# Altium PCB PCB.PcbDoc
Units mm, origin at the board's own origin, x right, y up, seen from the top; angles counter-clockwise.
Board outline 68.13 x 55.37 mm, 2 copper layers (Top Layer, Bottom Layer), stack 0.871 mm thick; 54 components, 87 nets, 298 pads, 1166 vias.
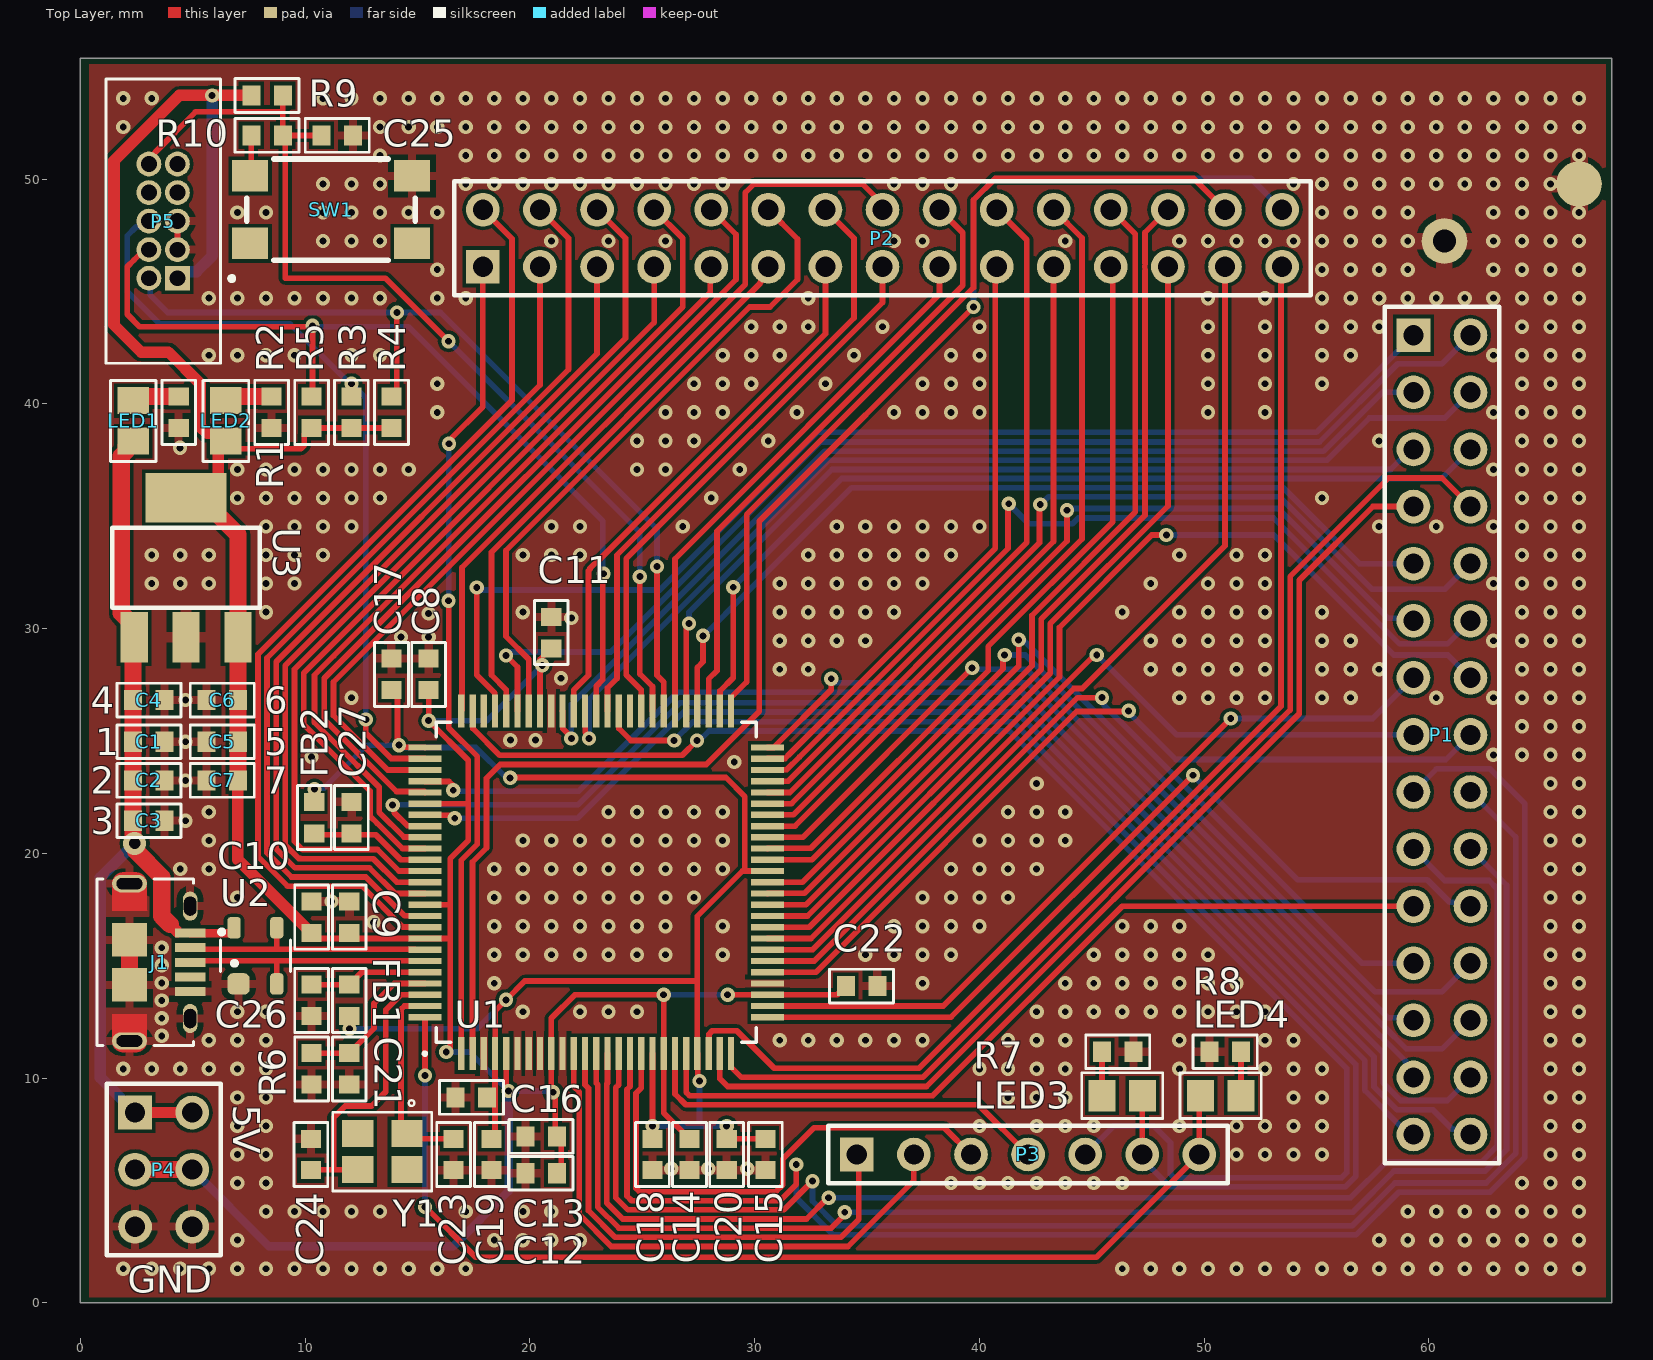
[diagram p0: Top Layer view]
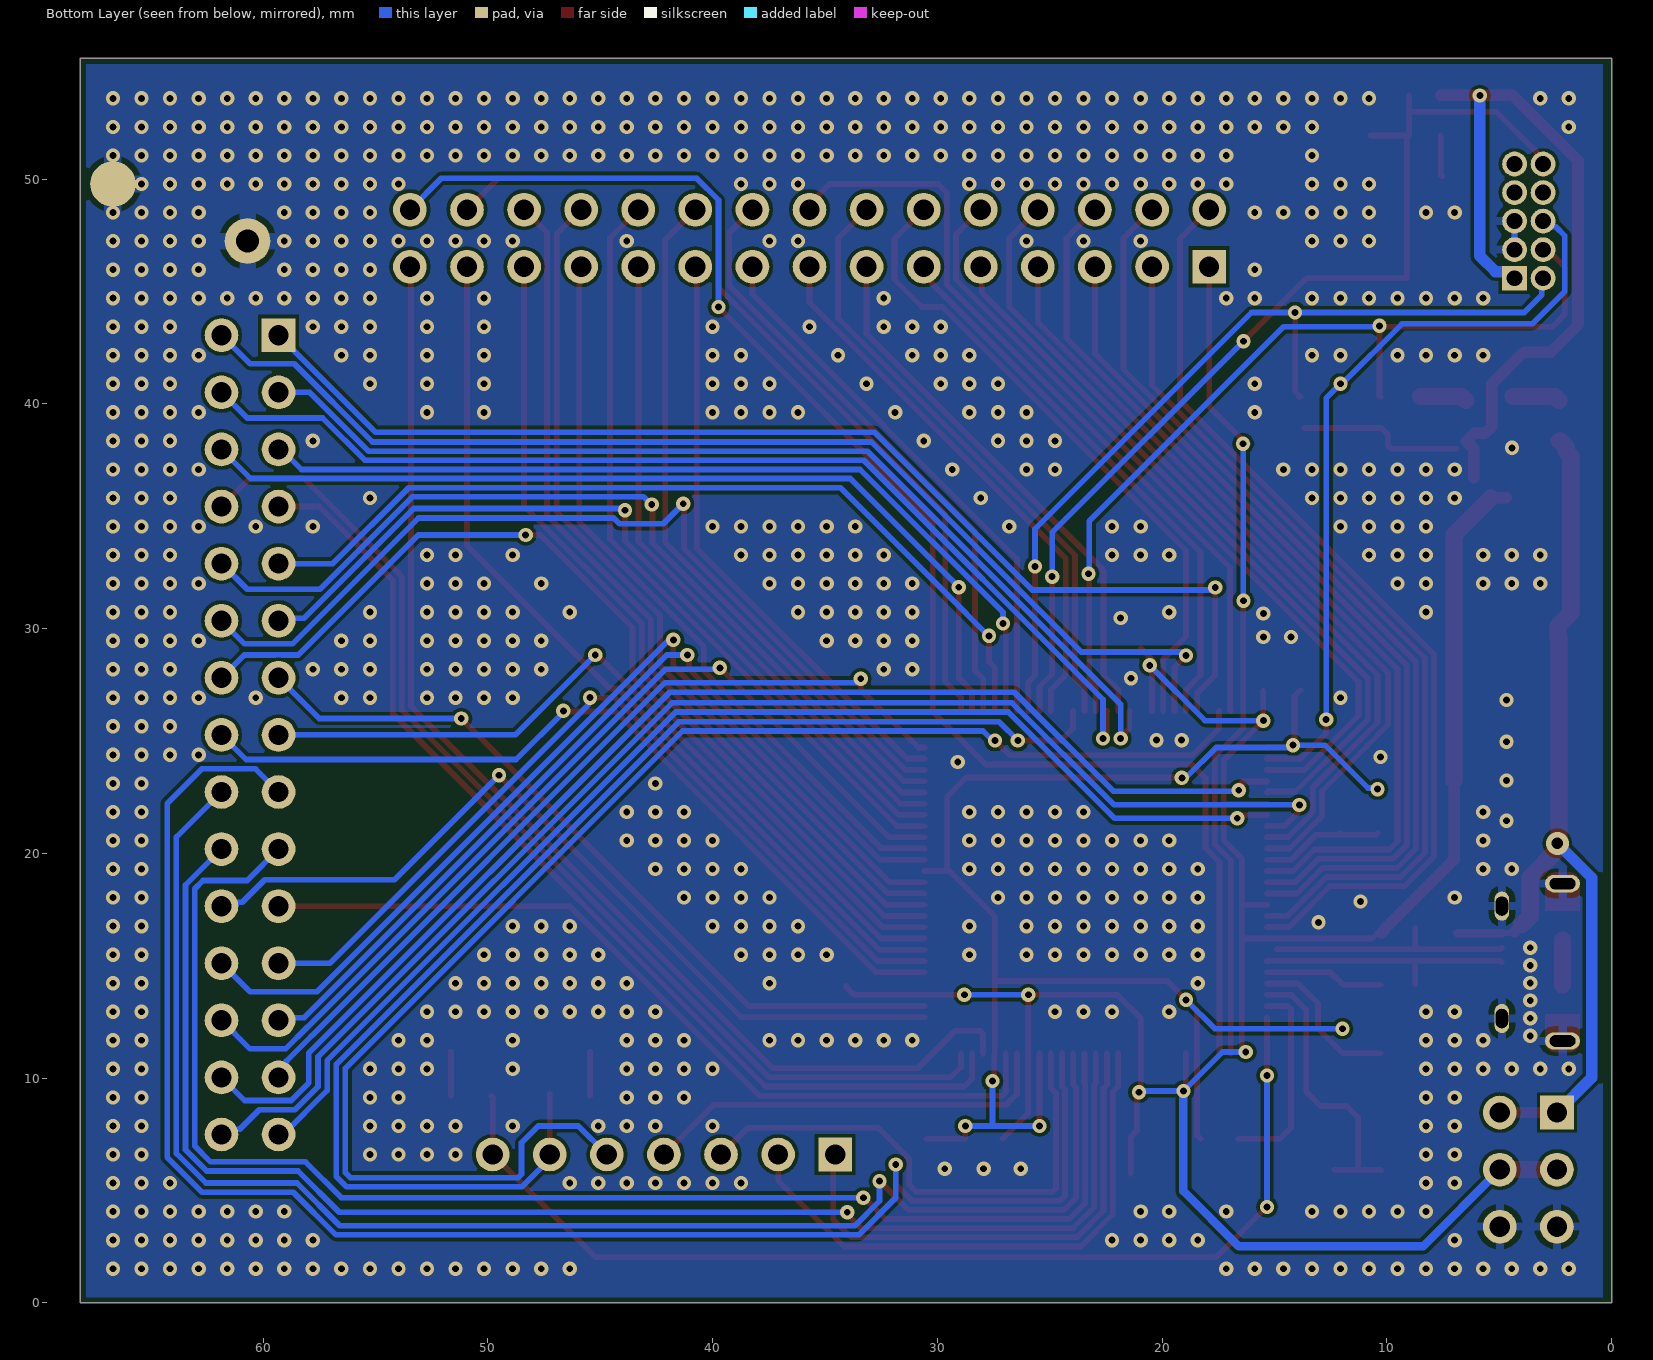
[diagram p1: Bottom Layer view, seen from below]
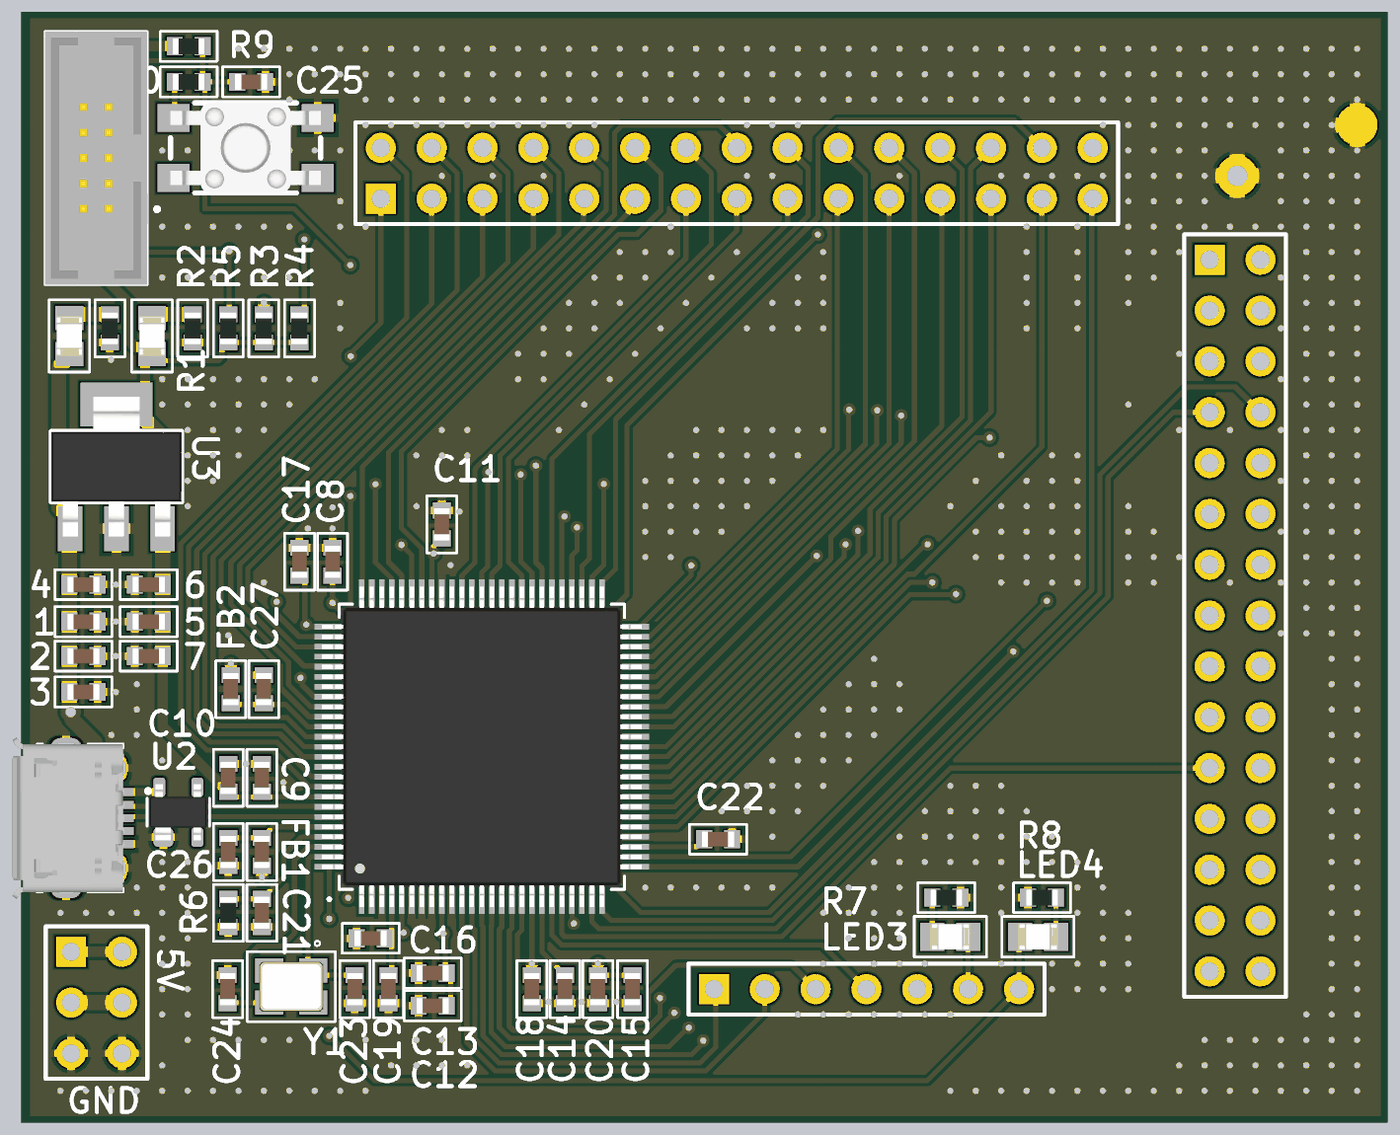
[diagram p2: 3D render of the assembled board from above, using the file's embedded part models]

## Layer stack, top to bottom
Top Solder: solder mask 0.0102, Solder Resist, Dk 3.5
Top Layer: signal copper 0.0356
Dielectric 1: core 0.8, FR-4, Dk 4.2
Bottom Layer: signal copper 0.0356
Solder Side: solder mask 0.0102, Solder Resist, Dk 3.5

## Board outline
0,0 0,55.372 68.127,55.372 68.127,0

## Design rules (kind name [scope] priority, off if disabled: settings)
BoardOutlineClearance [All] p1: gap=0.254 ignorepadtopadclearanceinfootprint=FALSE except(0: Arc-SplitContinuation Track-SplitContinuation SMDPad-SplitContinuation THPad-SplitContinuation Via-SplitContinuation Fill-SplitContinuation Poly-SplitContinuation Region-SplitContinuation Text-SplitContinuation)
Clearance [IsVia vs IsPad] p1: gap=-0.025 ignorepadtopadclearanceinfootprint=TRUE except(0: Arc-Hole Track-Hole SMDPad-Hole THPad-Hole Via-Hole Fill-Hole Poly-Hole Region-Hole Text-Hole)
Clearance Clearance_1 [All] p2: gap=0.152 ignorepadtopadclearanceinfootprint=TRUE except(0: Arc-Hole Track-Hole SMDPad-Hole THPad-Hole Via-Hole Fill-Hole Poly-Hole Region-Hole Text-Hole)
DiffPairsRouting DiffPair_USB_DiffPairsRouting [InDifferentialPair ('USB_D')] p1: maxlimit=0.254 minlimit=0.254 mostfreqgap=0.254 toplayer_minwidth=0.254 toplayer_maxwidth=0.381 toplayer_prefwidth=0.381 bottomlayer_minwidth=0.254 bottomlayer_maxwidth=0.381 bottomlayer_prefwidth=0.381 maxuncoupledlength=3.81
DiffPairsRouting [All] p2: maxlimit=0.254 minlimit=0.254 mostfreqgap=0.254 toplayer_minwidth=0.381 toplayer_maxwidth=0.381 toplayer_prefwidth=0.381 bottomlayer_minwidth=0.381 bottomlayer_maxwidth=0.381 bottomlayer_prefwidth=0.381 maxuncoupledlength=12.7
MatchedLengths MatchLengths_xSignals_J1_U1,U2_1 [InxSignalClass('xSignals_J1_U1,U2_MatchLengthsClass_1')] p1: tolerance=2.54 checknetsindiffpair=FALSE checkdiffpairvsdiffpair=TRUE checkxsignals=TRUE checkothers=TRUE
MatchedLengths MatchLengths_xSignals_J1_U1,U2 [InxSignalClass('xSignals_J1_U1,U2_MatchLengthsClass')] p2: tolerance=2.54 checknetsindiffpair=FALSE checkdiffpairvsdiffpair=TRUE checkxsignals=TRUE checkothers=TRUE
MatchedLengths DiffPair_USB_MatchedLengths [InDifferentialPair ('USB_D')] p3: tolerance=3.81 checknetsindiffpair=FALSE checkdiffpairvsdiffpair=TRUE checkxsignals=TRUE checkothers=TRUE
MinimumSolderMaskSliver [All] p1 off: minsoldermaskwidth=0.254
PolygonConnect PolygonConnect_GND [All vs InNet('GND')] p1: thpad.connectstyle=Relief thpad.reliefconductorwidth=0.381 thpad.reliefentries=4 thpad.polygonreliefangle="90 Angle" thpad.airgapwidth=0.254 smdpad.connectstyle=Relief smdpad.reliefconductorwidth=0.381 smdpad.reliefentries=4 smdpad.polygonreliefangle="90 Angle" smdpad.airgapwidth=0.254 via.connectstyle=Direct via.reliefconductorwidth=0.254 via.reliefentries=4 via.polygonreliefangle="90 Angle" via.airgapwidth=0.254
PolygonConnect [All] p2: thpad.connectstyle=Relief thpad.reliefconductorwidth=0.254 thpad.reliefentries=4 thpad.polygonreliefangle="90 Angle" thpad.airgapwidth=0.254 smdpad.connectstyle=Relief smdpad.reliefconductorwidth=0.254 smdpad.reliefentries=4 smdpad.polygonreliefangle="90 Angle" smdpad.airgapwidth=0.254 via.connectstyle=Direct via.reliefconductorwidth=0.254 via.reliefentries=4 via.polygonreliefangle="90 Angle" via.airgapwidth=0.254
RoutingVias [All] p1: holewidth=0.711 width=1.27 viastyle="Through Hole" minholewidth=0.305 minwidth=0.635 maxholewidth=0.711 maxwidth=1.27
SilkToSilkClearance [All] p1: silktosilkclearance=0.127
SolderMaskExpansion [All] p1: expansion=0.089 istentingtop=FALSE
Width [All] p1: maxlimit=1.27 minlimit=0.127 preferedwidth=0.254
27 further rules are at their usual default settings.

## Classes and differential pairs
component class Main_Sheet: 1 2 3 4 5 6 7 C8 C9 C10 C11 C12 C13 C14 C15 C16 C17 C18 C19 C20 C21 C22 C23 C24 C25 C26 C27 FB1 FB2 J1 LED1 LED2 LED3 LED4 P5 R1 R2 R3 R4 R5 R6 R7 R8 R9 R10 SW1 U1 U2 U3 Y1
component class Connectors: P1 P2 P3 P4
differential pair USB_D: +USB_D_P -USB_D_N

## Components (designator, comment, footprint, x,y, rotation, side; value= is the part's Value field where it differs from the comment)
C1 "Cap" C0603 3.048,24.968 r0 top value=10uF
C2 "Cap" C0603 3.048,23.246 r0 top value=2.2uF
C3 "Cap" C0603 3.048,21.456 r0 top value=1uF
C4 "Cap" C0603 3.048,26.822 r0 top value=4.7uF
C5 "Cap" C0603 6.31,24.968 r180 top value=4.7uF
C6 "Cap" C0603 6.31,26.822 r180 top value=1uF
C7 "Cap" C0603 6.31,23.246 r0 top value=10uF
C8 "Cap" C0603 15.494,27.963 r270 top value=100nF
C9 "Cap" C0603 11.963,17.164 r270 top value=100nF
C10 "Cap" C0603 10.287,17.164 r270 top value=100nF
C11 "Cap" C0603 20.951,29.827 r270 top value=100nF
C12 "Cap" C0603 20.497,7.409 r0 top value=100nF
C13 "Cap" C0603 20.497,5.77 r0 top value=100nF
C14 "Cap" C0603 27.102,6.604 r90 top value=100nF
C15 "Cap" C0603 30.48,6.604 r270 top value=100nF
C16 "Cap" C0603 17.399,9.144 r180 top value=1uF
C17 "Cap" C0603 13.843,27.963 r90 top value=100nF
C18 "Cap" C0603 25.451,6.604 r270 top value=100nF
C19 "Cap" C0603 18.288,6.604 r270 top value=100nF
C20 "Cap" C0603 28.753,6.604 r270 top value=100nF
C21 "Cap" C0603 11.963,10.414 r270 top value=10pF
C22 "Cap" C0603 34.755,14.097 r0 top value=100nF
C23 "Cap" C0603 16.606,6.604 r90 top value=36pF
C24 "Cap" C0603 10.256,6.604 r270 top value=36pF
C25 "Cap" C0603 11.43,51.943 r0 top value=10nF
C26 "Cap" C0603 10.287,13.462 r90 top value=100nF
C27 "Cap" C0603 12.06,21.596 r270 top value=100nF
FB1 "Ferrite Bead" C0603 11.963,13.462 r270 top
FB2 "Ferrite Bead" C0603 10.409,21.596 r90 top
J1 "10118194-0001LF" AMPHENOL_10118194-0001LF 2.184,15.154 r270 top locked
LED1 "LED" LED0805 2.348,39.243 r90 top
LED2 "LED" LED0805 6.477,39.243 r90 top
LED3 "LED" LED0805 46.355,9.223 r180 top
LED4 "LED" LED0805 50.735,9.223 r0 top
P1 "Header 15X2" HDR2X15 59.309,43.053 r270 top locked
P2 "Header 15X2" HDR2X15 17.907,46.101 r0 top locked
P3 "Header 7" HDR1X7 34.544,6.604 r0 top
P4 "Header 3X2" HDR2X3 2.434,8.471 r270 top
P5 "Header 5X2" IPC_5X2_1.27MM 3.683,48.133 r90 top
R1 "Res" R0603 4.374,39.624 r270 top value=330
R2 "Res" R0603 8.509,39.624 r270 top value=330
R3 "Res" R0603 12.06,39.624 r90 top value=100K
R4 "Res" R0603 13.843,39.624 r90 top value=100K
R5 "Res" R0603 10.287,39.624 r90 top value=100K
R6 "Res" R0603 10.287,10.414 r270 top value=5.62K
R7 "Res" R0603 46.155,11.176 r0 top value=330
R8 "Res" R0603 50.935,11.176 r180 top value=330
R9 "Res" R0603 8.306,53.721 r0 top value=100K
R10 "Res" R0603 8.306,51.943 r180 top value=330
SW1 "Button" TL3305 11.151,48.641 r180 top
U1 "ATSAME70N19A-AN" TQFP100_14x14MC_MCH 22.951,18.715 r90 top locked
U2 "5.5V TVS Diode" SOT143 7.789,15.443 r90 top
U3 "AP2114HA" SOT230P700X180-4N 4.699,32.715 r0 top
Y1 "XTAL" SMD-4 13.431,6.731 r180 top

## Footprints (in the part's own frame and the unit in brackets; to place one, negate y for a bottom-side part, rotate by r counter-clockwise, add the part's x,y. Pads: shape width x height; smd on the part's side, far side on the other; paste and mask are expansions set on the pad)
AMPHENOL_10118194-0001LF [mm]
  rect 0.4x1.35 smd: 1(-1.3,2.7) 2(-0.65,2.7) 3(0,2.7) 4(0.65,2.7) 5(1.3,2.7)
  oval 1.3x0.65 hole 0.55 slot 0.85 at 0 deg: S1(-2.5,2.7) S2(2.5,2.7)
  oval 0.775x1.55 hole 0.5 slot 1.15 at 90 deg: S3(-3.5,0) S6(3.5,0)
  rect 1.5x1.55 smd: S4(-1,0) S5(1,0)
  Top Layer region: 193 vertices and 0 holes, not listed, extent 2.3,-0.78 4,0.775
  Top Layer region: 193 vertices and 0 holes, not listed, extent -4,-0.775 -2.3,0.78
  silkscreen extent -3.7,-1.45 3.7,4.2, body extent -4.02,-2.68 4.02,2.9, height 2.72
C0603 [mm] "Chip Capacitor, Body 1.6x0.8mm, IPC High Density"
  rect 0.8x0.9 smd: 1(-0.7,0) 2(0.7,0)
  silkscreen extent -1.43,-0.75 1.43,0.75, body extent -0.8,-0.4 0.8,0.4, height 0.8
HDR1X7 [mm] "Connector; Header; 7 Position"
  rect 1.5x1.5 hole 0.9: 1(0,0)
  round 1.5 hole 0.9: 2(2.54,0) 3(5.08,0) 4(7.62,0) 5(10.16,0) 6(12.7,0) 7(15.24,0)
  silkscreen extent -1.27,-1.27 16.51,1.27
HDR2X3 [mm] "Connector; Header; 3x2 Position"
  rect 1.5x1.5 hole 0.9: 1(0,0)
  round 1.5 hole 0.9: 2(0,2.54) 3(2.54,0) 4(2.54,2.54) 5(5.08,0) 6(5.08,2.54)
  silkscreen extent -1.27,-1.27 6.35,3.81
HDR2X15 [mm] "Connector; Header; 15x2 Position"
  rect 1.5x1.5 hole 0.9: 1(0,0)
  round 1.5 hole 0.9: 2(0,2.54) 3(2.54,0) 4(2.54,2.54) 5(5.08,0) 6(5.08,2.54) 7(7.62,0) 8(7.62,2.54) 9(10.16,0) 10(10.16,2.54) 11(12.7,0) 12(12.7,2.54) 13(15.24,0) 14(15.24,2.54) 15(17.78,0) 16(17.78,2.54) 17(20.32,0) 18(20.32,2.54) 19(22.86,0) 20(22.86,2.54) 21(25.4,0) 22(25.4,2.54) 23(27.94,0) 24(27.94,2.54) 25(30.48,0) 26(30.48,2.54) 27(33.02,0) 28(33.02,2.54) 29(35.56,0) 30(35.56,2.54)
  silkscreen extent -1.27,-1.27 36.83,3.81
IPC_5X2_1.27MM [mm]
  rect 1.1x1.1 hole 0.7: 1(-2.54,-0.635)
  round 1.1 hole 0.7: 2(-2.54,0.635) 3(-1.27,-0.635) 4(-1.27,0.635) 5(0,-0.635) 6(0,0.635) 7(1.27,-0.635) 8(1.27,0.635) 9(2.54,-0.635) 10(2.54,0.635)
  silkscreen extent -6.32,-3.15 6.32,2.55, body extent -6.32,-2.58 6.33,2.55, height 5.4
LED0805 [mm] "Chip Resistor, Body 2.0x1.2mm, IPC Medium Density"
  rect 1.2x1.4 smd: 1(-0.9,0) 2(0.9,0)
  silkscreen extent -1.8,-1.02 1.8,1.02, body extent -1,-0.62 1,0.63, height 1.1
R0603 [mm] "Chip Resistor Body 1.6x0.8mm, IPC High Density"
  rect 0.8x0.9 smd: 1(-0.7,0) 2(0.7,0)
  silkscreen extent -1.43,-0.75 1.43,0.75, body extent -0.8,-0.4 0.8,0.4, height 0.45
SMD-4 [mm]
  rect 1.4x1.2 smd: 1(-1.1,-0.8) 2(1.1,-0.8) 3(1.1,0.8) 4(-1.1,0.8)
  silkscreen extent -2.2,-2.29 2.2,1.75, body extent -1.6,-1.25 1.6,1.25, height 0.64
SOT143 [mm]
  rrect50% 0.95x0.99 smd: 1(-1.25,0.75)
  rrect50% 0.95x0.59 smd: 2(-1.25,-0.95) 3(1.25,-0.95) 4(1.25,0.95)
  silkscreen extent -0.7,-1.56 0.7,1.56, body extent -1.4,-1.45 1.4,1.45, height 1.2
SOT230P700X180-4N [mil]
  rect 48x88 smd: 1(-91,-122) 2(0,-122) 3(91,-122)
  rect 141.73x86.61 smd: 4(0,122.01)
  silkscreen extent -129,-70 129,70, body extent -128,-138 128,138, height 67
TL3305 [mm]
  rect 1.6x1.4 smd: 1(-3.6,-1.5) 2(3.6,-1.5) 3(-3.6,1.5) 4(3.6,1.5)
  silkscreen extent -3.75,-2.25 3.75,2.25, body extent -3.75,-2.25 3.75,2.25, height 6.9
TQFP100_14x14MC_MCH [mil]
  rect 58x11 smd paste+0 mask+0: 1(-300,236.22) 2(-300,216.54) 3(-300,196.85) 4(-300,177.17) 5(-300,157.48) 6(-300,137.8) 7(-300,118.11) 8(-300,98.43) 9(-300,78.74) 10(-300,59.06) 11(-300,39.37) 12(-300,19.69) 13(-300,0) 14(-300,-19.68) 15(-300,-39.37) 16(-300,-59.06) 17(-300,-78.74) 18(-300,-98.43) 19(-300,-118.11) 20(-300,-137.8) 21(-300,-157.48) 22(-300,-177.17) 23(-300,-196.85) 24(-300,-216.54) 25(-300,-236.22) 51(300,-236.22) 52(300,-216.54) 53(300,-196.85) 54(300,-177.17) 55(300,-157.48) 56(300,-137.8) 57(300,-118.11) 58(300,-98.43) 59(300,-78.74) 60(300,-59.06) 61(300,-39.37) 62(300,-19.68) 63(300,0) 64(300,19.68) 65(300,39.37) 66(300,59.06) 67(300,78.74) 68(300,98.43) 69(300,118.11) 70(300,137.8) 71(300,157.48) 72(300,177.17) 73(300,196.85) 74(300,216.54) 75(300,236.22)
  rect 11x58 smd paste+0 mask+0: 26(-236.22,-300) 27(-216.54,-300) 28(-196.85,-300) 29(-177.17,-300) 30(-157.48,-300) 31(-137.8,-300) 32(-118.11,-300) 33(-98.43,-300) 34(-78.74,-300) 35(-59.06,-300) 36(-39.37,-300) 37(-19.69,-300) 38(0,-300) 39(19.68,-300) 40(39.37,-300) 41(59.06,-300) 42(78.74,-300) 43(98.43,-300) 44(118.11,-300) 45(137.8,-300) 46(157.48,-300) 47(177.17,-300) 48(196.85,-300) 49(216.54,-300) 50(236.22,-300) 76(236.22,300) 77(216.54,300) 78(196.85,300) 79(177.17,300) 80(157.48,300) 81(137.8,300) 82(118.11,300) 83(98.43,300) 84(78.74,300) 85(59.06,300) 86(39.37,300) 87(19.68,300) 88(0,300) 89(-19.69,300) 90(-39.37,300) 91(-59.06,300) 92(-78.74,300) 93(-98.43,300) 94(-118.11,300) 95(-137.8,300) 96(-157.48,300) 97(-177.17,300) 98(-196.85,300) 99(-216.54,300) 100(-236.22,300)
  silkscreen extent -301,-280 280,301, body extent -315,-315 315,315, height 59

## Part data
FB2: "BLM18PG471SN1D"
J1: "USB - micro B USB 2.0 Receptacle Connector 5 Position Surface Mount, Right Angle; Through Hole", Package=None, Availability=Unavailable, MF="Amphenol ICC", MP=10118194-0001LF, Price=None, SnapEDA_Link=https://www.snapeda.com/parts/10118194-0001LF/Amphenol%20FCI/view-part/1413308/?ref=snap
P1 P2: "Header, 15-Pin, Dual row", LatestRevisionDate=17-Jul-2002, LatestRevisionNote="Re-released for DXP Platform.", Publisher="Altium Limited"
P3: "Header, 7-Pin", LatestRevisionDate=17-Jul-2002, LatestRevisionNote="Re-released for DXP Platform.", Publisher="Altium Limited"
P4: "Header, 3-Pin, Dual row", LatestRevisionDate=17-Jul-2002, LatestRevisionNote="Re-released for DXP Platform.", Publisher="Altium Limited"
P5: "Header, 5-Pin, Dual row", LatestRevisionDate=17-Jul-2002, LatestRevisionNote="Re-released for DXP Platform.", Publisher="Altium Limited"
SW1: "Push Button"
U1: "No Description Available", Built_By=EMA_Molly, Copyright="Copyright (C) 2018 Accelerated Designs. All rights reserved", Manufacturer_Part_Number=ATSAME70N19A-AN, RefDes=RefDes, SourceLibrary=Microchip_2019-08-23_25, Type=DEV, Vendor=Microchip
U2: library part PRTR5V0U2X
U3: "3.3V LDO"
Y1: "ECS-120-10-33B-CKM-TR", LatestRevisionDate=17-Jul-2002, LatestRevisionNote="Re-released for DXP Platform.", PackageDescription="Crystal, Thru-Hole; 2 Leads; Body 3.1 x 8.2 mm (Dia.xH)", PackageReference=R38, Published=8-Jun-2000, Publisher="Altium Limited"

## Free pads (board coordinates)
  round 2.032 hole 1.016: 1(60.688,47.244)
  round 2.032 all layers, no hole: 1(66.675,49.784)

## Via types
v1: diameter 0.635, hole 0.305, Top Layer to Bottom Layer, tented both sides, 1165 vias
v2: diameter 1.016, hole 0.508, Top Layer to Bottom Layer, tented both sides, 1 vias

## Nets (pads, with @x,y where several pads share a name; then routed paths per layer and width w, separated by ;. In a path a pad name is that pad's centre, name@x,y a point inside that pad or via, vN(x,y) a via of type N, cw(c..) or ccw(c..) an arc to the next point about the centre after c; other vN are vias at no path point)
+3V3: C5.1 C6.1 C7.2 C8.2 C9.2 C10.2 C11.2 C12.2 C13.2 C14.2 C22.1 LED2.1 P4.3 P4.4 P5.1 R3.1 R4.1 R5.1 R9.1 U1.5 U1.9 U1.19 U1.28 U1.68 U1.81 U1.90 U1.93 U3.3 U3.4 | length 156.9
  Top Layer w0.254: LED2.1@6.884,37.999 9.815,37.999 9.964,38.148 9.964,38.651 10.237,38.924 R3.1 R4.1@13.663,38.924 ; C10.2@10.414,16.464 10.663,16.215 U1.93 16.44,16.215 16.453,16.227 ; U1.90 16.453,17.715 ; U1.81 17.098,22.215 ; C8.2@15.494,27.239 v1(15.494,25.908) 17.256,24.146 17.256,20.581 16.453,19.778 16.453,17.715 ; v1(16.275,11.166) 16.453,11.343 16.453,16.227 ; U1.5 18.951,9.526 v1(19.05,9.427) ; U1.68 20.451,28.167 20.548,28.264 v1(20.548,28.367) ; v1@20.451,28.367 20.451,28.627 C11.2 ; v1(21.032,9.376) 21.032,9.479 20.951,9.56 U1.9 20.951,12.664 22.001,13.715 v1(25.951,13.715) U1.19@25.951,11.181 ; v1@21.124,9.376 21.124,7.658 21.397,7.385 C13.2@21.397,5.746 ; U1.19 25.951,8.455 C14.2 ; v1(28.799,13.715) 33.673,13.715 33.732,13.774 33.782,13.774 34.055,14.047 C22.1 ; 16.453,16.227 16.453,17.715
  Top Layer w0.508: C7.2 7.01,19.716 10.091,16.635 10.091,16.61 C10.2@10.237,16.464
  Top Layer w0.512: U3.4 U3.4@5.379,35.814 ; U3.4@6.133,36.703 6.133,37.999 LED2.1 6.133,38.687 5.634,38.687 5.334,38.987 5.334,40.894 3.92,42.308 2.7,42.308 1.496,43.513 1.496,50.822 4.394,53.721 v1(5.862,53.721) R9.1
  Top Layer w0.762: P4.3 P4.4 ; U3.4@5.379,35.814 7.01,34.182 U3.3 C6.1 C5.1@7.01,25.008 ; C7.2 C5.1
  Bottom Layer w0.254: v1(15.494,25.908) 18.089,25.908 v1(20.548,28.367) ; v1(16.275,11.166) 17.311,11.166 v1(19.05,9.427) 20.981,9.427 v1(21.032,9.376) ; v1(25.951,13.715) v1(28.799,13.715)
  Bottom Layer w0.381: P4.4 8.391,2.514 16.585,2.514 19.05,4.979 v1(19.05,9.427)
  Bottom Layer w0.512: P5.1 4.612,45.887 5.169,45.887 5.862,46.58 v1(5.862,53.721)
GND: C1.2 C2.2 C3.2 C4.2 C5.2 C6.2 C7.1 C8.1 C9.1 C10.1 C11.1 C12.1 C13.1 C14.1 C15.2 C16.2 C17.2 C18.2 C19.2 C20.2 C21.2 C22.2 C23.1 C24.1 C25.2 C26.1 C27.1 J1.5 J1.S1 J1.S2 J1.S3 J1.S4 J1.S5 J1.S6 P4.5 P4.6 P5.3 P5.5 pad.1 R1.2 R2.2 R6.2 R7.2 R8.2 SW1.1 U1.3 U1.6 U1.7 U1.8 U1.10 U1.29 U1.67 U2.1 U3.2 | length 4.5
  Top Layer w0.254: P5.3 P5.5
  Top Layer w0.762: J1.S5 J1.S4
  Bottom Layer w0.254: P5.3 P5.5
  other v1: 1.905,1.524 3.175,1.524 4.445,1.524 5.715,1.524 6.985,1.524 8.255,1.524 9.525,1.524 10.795,1.524 12.065,1.524 13.335,1.524 14.605,1.524 15.875,1.524 17.145,1.524 46.355,1.524 47.625,1.524 48.895,1.524 50.165,1.524 51.435,1.524 52.705,1.524 53.975,1.524 55.245,1.524 56.515,1.524 57.785,1.524 59.055,1.524 60.325,1.524 61.595,1.524 62.865,1.524 64.135,1.524 65.405,1.524 66.675,1.524 6.985,2.794 18.415,2.794 19.685,2.794 20.955,2.794 22.225,2.794 57.785,2.794 59.055,2.794 60.325,2.794 61.595,2.794 62.865,2.794 64.135,2.794 65.405,2.794 66.675,2.794 8.255,4.064 9.525,4.064 10.795,4.064 12.065,4.064 13.335,4.064 17.145,4.064 19.685,4.064 20.955,4.064 59.055,4.064 60.325,4.064 61.595,4.064 62.865,4.064 64.135,4.064 65.405,4.064 66.675,4.064 6.985,5.334 8.255,5.334 38.735,5.334 40.005,5.334 41.275,5.334 42.545,5.334 43.815,5.334 45.085,5.334 46.355,5.334 64.135,5.334 65.405,5.334 66.675,5.334 26.289,5.969 27.94,5.969 29.667,5.969 6.985,6.604 8.255,6.604 51.435,6.604 52.705,6.604 53.975,6.604 55.245,6.604 65.405,6.604 66.675,6.604 6.985,7.874 8.255,7.874 40.005,7.874 42.545,7.874 43.815,7.874 45.085,7.874 48.895,7.874 51.435,7.874 52.705,7.874 53.975,7.874 55.245,7.874 65.405,7.874 66.675,7.874 6.985,9.144 8.255,9.144 41.275,9.144 42.545,9.144 43.815,9.144 53.975,9.144 55.245,9.144 65.405,9.144 66.675,9.144 1.905,10.414 3.175,10.414 4.445,10.414 5.715,10.414 6.985,10.414 8.255,10.414 40.005,10.414 41.275,10.414 42.545,10.414 43.815,10.414 48.895,10.414 52.705,10.414 53.975,10.414 55.245,10.414 65.405,10.414 66.675,10.414 5.715,11.684 6.985,11.684 8.255,11.684 31.115,11.684 32.385,11.684 33.655,11.684 34.925,11.684 36.195,11.684 37.465,11.684 41.275,11.684 42.545,11.684 43.815,11.684 48.895,11.684 52.705,11.684 53.975,11.684 65.405,11.684 66.675,11.684 3.621,11.883 3.621,12.667 6.985,12.954 8.255,12.954 19.685,12.954 22.225,12.954 23.495,12.954 24.765,12.954 42.545,12.954 43.815,12.954 45.085,12.954 46.355,12.954 47.625,12.954 48.895,12.954 50.165,12.954 51.435,12.954 52.705,12.954 65.405,12.954 66.675,12.954 3.621,13.451 3.621,14.236 18.415,14.224 37.465,14.224 37.465,14.224 43.815,14.224 43.815,14.224 45.085,14.224 45.085,14.224 46.355,14.224 46.355,14.224 47.625,14.224 47.625,14.224 48.895,14.224 48.895,14.224 50.165,14.224 50.165,14.224 51.435,14.224 51.435,14.224 65.405,14.224 65.405,14.224 66.675,14.224 66.675,14.224 3.621,15.02 18.415,15.494 19.685,15.494 20.955,15.494 22.225,15.494 23.495,15.494 24.765,15.494 26.035,15.494 28.575,15.494 28.575,15.494 34.925,15.494 34.925,15.494 36.195,15.494 36.195,15.494 37.465,15.494 37.465,15.494 38.735,15.494 38.735,15.494 45.085,15.494 45.085,15.494 46.355,15.494 46.355,15.494 47.625,15.494 47.625,15.494 48.895,15.494 48.895,15.494 50.165,15.494 50.165,15.494 65.405,15.494 65.405,15.494 66.675,15.494 66.675,15.494 3.621,15.804 18.415,16.764 19.685,16.764 20.955,16.764 22.225,16.764 23.495,16.764 24.765,16.764 26.035,16.764 28.575,16.764 28.575,16.764 36.195,16.764 36.195,16.764 37.465,16.764 37.465,16.764 38.735,16.764 38.735,16.764 40.005,16.764 40.005,16.764 46.355,16.764 46.355,16.764 47.625,16.764 47.625,16.764 48.895,16.764 48.895,16.764 65.405,16.764 65.405,16.764 66.675,16.764 66.675,16.764 13.039,16.934 11.176,17.864 6.985,18.034 18.415,18.034 19.685,18.034 20.955,18.034 22.225,18.034 23.495,18.034 24.765,18.034 26.035,18.034 27.305,18.034 27.305,18.034 37.465,18.034 37.465,18.034 38.735,18.034 38.735,18.034 40.005,18.034 40.005,18.034 41.275,18.034 41.275,18.034 65.405,18.034 65.405,18.034 66.675,18.034 66.675,18.034 4.445,19.304 5.715,19.304 18.415,19.304 19.685,19.304 20.955,19.304 22.225,19.304 23.495,19.304 24.765,19.304 26.035,19.304 27.305,19.304 27.305,19.304 28.575,19.304 28.575,19.304 38.735,19.304 38.735,19.304 40.005,19.304 40.005,19.304 41.275,19.304 41.275,19.304 42.545,19.304 42.545,19.304 65.405,19.304 65.405,19.304 66.675,19.304 66.675,19.304 5.715,20.574 19.685,20.574 20.955,20.574 22.225,20.574 23.495,20.574 24.765,20.574 26.035,20.574 27.305,20.574 27.305,20.574 28.575,20.574 28.575,20.574 40.005,20.574 40.005,20.574 41.275,20.574 41.275,20.574 42.545,20.574 42.545,20.574 43.815,20.574 43.815,20.574 65.405,20.574 65.405,20.574 66.675,20.574 66.675,20.574 4.672,21.456 5.715,21.844 23.495,21.844 24.765,21.844 26.035,21.844 27.305,21.844 27.305,21.844 28.575,21.844 28.575,21.844 41.275,21.844 41.275,21.844 42.545,21.844 42.545,21.844 43.815,21.844 43.815,21.844 65.405,21.844 65.405,21.844 66.675,21.844 66.675,21.844 42.545,23.114 42.545,23.114 65.405,23.114 65.405,23.114 66.675,23.114 66.675,23.114 4.672,23.246 29.092,24.067 10.283,24.291 62.865,24.384 62.865,24.384 64.135,24.384 64.135,24.384 65.405,24.384 65.405,24.384 66.675,24.384 66.675,24.384 4.672,24.968 19.13,25.04 20.247,25.04 64.135,25.654 64.135,25.654 65.405,25.654 65.405,25.654 66.675,25.654 66.675,25.654 4.672,26.822 12.065,26.924 48.895,26.924 48.895,26.924 50.165,26.924 50.165,26.924 51.435,26.924 51.435,26.924 52.705,26.924 52.705,26.924 55.245,26.924 55.245,26.924 56.515,26.924 56.515,26.924 60.325,26.924 60.325,26.924 62.865,26.924 62.865,26.924 64.135,26.924 64.135,26.924 65.405,26.924 65.405,26.924 66.675,26.924 66.675,26.924 21.387,27.792 31.115,28.194 31.115,28.194 32.385,28.194 32.385,28.194 47.625,28.194 47.625,28.194 48.895,28.194 48.895,28.194 50.165,28.194 50.165,28.194 51.435,28.194 51.435,28.194 52.705,28.194 52.705,28.194 55.245,28.194 55.245,28.194 56.515,28.194 56.515,28.194 57.785,28.194 57.785,28.194 64.135,28.194 64.135,28.194 65.405,28.194 65.405,28.194 66.675,28.194 66.675,28.194 31.115,29.464 31.115,29.464 32.385,29.464 32.385,29.464 33.655,29.464 33.655,29.464 34.925,29.464 34.925,29.464 47.625,29.464 47.625,29.464 48.895,29.464 48.895,29.464 50.165,29.464 50.165,29.464 51.435,29.464 51.435,29.464 52.705,29.464 52.705,29.464 55.245,29.464 55.245,29.464 56.515,29.464 56.515,29.464 62.865,29.464 62.865,29.464 64.135,29.464 64.135,29.464 65.405,29.464 65.405,29.464 66.675,29.464 66.675,29.464 14.266,29.624 15.494,29.624 21.845,30.471 15.494,30.679 8.255,30.734 19.685,30.734 31.115,30.734 31.115,30.734 32.385,30.734 32.385,30.734 33.655,30.734 33.655,30.734 34.925,30.734 34.925,30.734 36.195,30.734 36.195,30.734 46.355,30.734 46.355,30.734 48.895,30.734 48.895,30.734 50.165,30.734 50.165,30.734 51.435,30.734 51.435,30.734 52.705,30.734 52.705,30.734 55.245,30.734 55.245,30.734 64.135,30.734 64.135,30.734 65.405,30.734 65.405,30.734 66.675,30.734 66.675,30.734 3.175,32.004 4.445,32.004 5.715,32.004 8.255,32.004 9.525,32.004 31.115,32.004 31.115,32.004 32.385,32.004 32.385,32.004 33.655,32.004 33.655,32.004 34.925,32.004 34.925,32.004 36.195,32.004 36.195,32.004 37.465,32.004 37.465,32.004 47.625,32.004 47.625,32.004 50.165,32.004 50.165,32.004 51.435,32.004 51.435,32.004 52.705,32.004 52.705,32.004 62.865,32.004 62.865,32.004 64.135,32.004 64.135,32.004 65.405,32.004 65.405,32.004 66.675,32.004 66.675,32.004 3.175,33.274 4.445,33.274 5.715,33.274 8.255,33.274 9.525,33.274 10.795,33.274 19.685,33.274 20.955,33.274 22.225,33.274 32.385,33.274 32.385,33.274 33.655,33.274 33.655,33.274 34.925,33.274 34.925,33.274 36.195,33.274 36.195,33.274 37.465,33.274 37.465,33.274 38.735,33.274 38.735,33.274 48.895,33.274 48.895,33.274 51.435,33.274 51.435,33.274 52.705,33.274 52.705,33.274 64.135,33.274 64.135,33.274 65.405,33.274 65.405,33.274 66.675,33.274 66.675,33.274 8.255,34.544 9.525,34.544 10.795,34.544 12.065,34.544 20.955,34.544 22.225,34.544 26.797,34.544 33.655,34.544 33.655,34.544 34.925,34.544 34.925,34.544 36.195,34.544 36.195,34.544 37.465,34.544 37.465,34.544 38.735,34.544 38.735,34.544 40.005,34.544 40.005,34.544 57.785,34.544 57.785,34.544 60.325,34.544 60.325,34.544 62.865,34.544 62.865,34.544 64.135,34.544 64.135,34.544 65.405,34.544 65.405,34.544 66.675,34.544 66.675,34.544 6.985,35.814 8.255,35.814 9.525,35.814 10.795,35.814 12.065,35.814 13.335,35.814 28.067,35.814 55.245,35.814 55.245,35.814 64.135,35.814 64.135,35.814 65.405,35.814 65.405,35.814 66.675,35.814 66.675,35.814 6.985,37.084 8.255,37.084 9.525,37.084 10.795,37.084 12.065,37.084 13.335,37.084 14.605,37.084 24.765,37.084 26.035,37.084 29.337,37.084 62.865,37.084 62.865,37.084 64.135,37.084 64.135,37.084 65.405,37.084 65.405,37.084 66.675,37.084 66.675,37.084 4.43,38.044 24.765,38.354 26.035,38.354 27.305,38.354 27.305,38.354 30.607,38.354 57.785,38.354 57.785,38.354 64.135,38.354 64.135,38.354 65.405,38.354 65.405,38.354 66.675,38.354 66.675,38.354 15.875,39.624 26.035,39.624 27.305,39.624 27.305,39.624 28.575,39.624 28.575,39.624 31.877,39.624 36.195,39.624 36.195,39.624 37.465,39.624 37.465,39.624 38.735,39.624 38.735,39.624 40.005,39.624 40.005,39.624 50.165,39.624 50.165,39.624 52.705,39.624 52.705,39.624 62.865,39.624 62.865,39.624 64.135,39.624 64.135,39.624 65.405,39.624 65.405,39.624 66.675,39.624 66.675,39.624 15.875,40.894 27.305,40.894 27.305,40.894 28.575,40.894 28.575,40.894 29.845,40.894 29.845,40.894 33.147,40.894 37.465,40.894 37.465,40.894 38.735,40.894 38.735,40.894 40.005,40.894 40.005,40.894 50.165,40.894 50.165,40.894 52.705,40.894 52.705,40.894 55.245,40.894 55.245,40.894 64.135,40.894 64.135,40.894 65.405,40.894 65.405,40.894 66.675,40.894 66.675,40.894 5.715,42.164 6.985,42.164 8.255,42.164 9.525,42.164 12.065,42.164 13.335,42.164 28.575,42.164 28.575,42.164 29.845,42.164 29.845,42.164 31.115,42.164 31.115,42.164 34.417,42.164 38.735,42.164 38.735,42.164 40.005,42.164 40.005,42.164 50.165,42.164 50.165,42.164 52.705,42.164 52.705,42.164 55.245,42.164 55.245,42.164 56.515,42.164 56.515,42.164 62.865,42.164 62.865,42.164 64.135,42.164 64.135,42.164 65.405,42.164 65.405,42.164 66.675,42.164 66.675,42.164 29.845,43.434 29.845,43.434 31.115,43.434 31.115,43.434 32.385,43.434 32.385,43.434 35.687,43.434 40.005,43.434 40.005,43.434 50.165,43.434 50.165,43.434 52.705,43.434 52.705,43.434 55.245,43.434 55.245,43.434 56.515,43.434 56.515,43.434 57.785,43.434 57.785,43.434 64.135,43.434 64.135,43.434 65.405,43.434 65.405,43.434 66.675,43.434 66.675,43.434 5.715,44.704 6.985,44.704 8.255,44.704 9.525,44.704 10.795,44.704 12.065,44.704 13.335,44.704 15.875,44.704 17.145,44.704 32.385,44.704 32.385,44.704 50.165,44.704 50.165,44.704 52.705,44.704 52.705,44.704 55.245,44.704 55.245,44.704 56.515,44.704 56.515,44.704 57.785,44.704 57.785,44.704 59.055,44.704 59.055,44.704 60.325,44.704 60.325,44.704 61.595,44.704 61.595,44.704 62.865,44.704 62.865,44.704 64.135,44.704 64.135,44.704 65.405,44.704 65.405,44.704 66.675,44.704 66.675,44.704 15.875,45.974 55.245,45.974 55.245,45.974 56.515,45.974 56.515,45.974 57.785,45.974 57.785,45.974 59.055,45.974 59.055,45.974 62.865,45.974 62.865,45.974 64.135,45.974 64.135,45.974 65.405,45.974 65.405,45.974 66.675,45.974 66.675,45.974 10.795,47.244 12.065,47.244 13.335,47.244 20.955,47.244 23.495,47.244 26.035,47.244 36.195,47.244 36.195,47.244 37.465,47.244 37.465,47.244 43.815,47.244 43.815,47.244 48.895,47.244 48.895,47.244 50.165,47.244 50.165,47.244 51.435,47.244 51.435,47.244 52.705,47.244 52.705,47.244 53.975,47.244 53.975,47.244 55.245,47.244 55.245,47.244 56.515,47.244 56.515,47.244 57.785,47.244 57.785,47.244 59.055,47.244 59.055,47.244 62.865,47.244 62.865,47.244 64.135,47.244 64.135,47.244 65.405,47.244 65.405,47.244 66.675,47.244 66.675,47.244 6.985,48.514 8.255,48.514 10.795,48.514 12.065,48.514 13.335,48.514 14.605,48.514 15.875,48.514 55.245,48.514 55.245,48.514 56.515,48.514 56.515,48.514 57.785,48.514 57.785,48.514 59.055,48.514 59.055,48.514 62.865,48.514 62.865,48.514 64.135,48.514 64.135,48.514 65.405,48.514 65.405,48.514 66.675,48.514 66.675,48.514 10.795,49.784 12.065,49.784 13.335,49.784 17.145,49.784 18.415,49.784 19.685,49.784 20.955,49.784 22.225,49.784 23.495,49.784 24.765,49.784 26.035,49.784 27.305,49.784 27.305,49.784 28.575,49.784 28.575,49.784 36.195,49.784 36.195,49.784 37.465,49.784 37.465,49.784 38.735,49.784 38.735,49.784 53.975,49.784 53.975,49.784 55.245,49.784 55.245,49.784 56.515,49.784 56.515,49.784 57.785,49.784 57.785,49.784 59.055,49.784 59.055,49.784 60.325,49.784 60.325,49.784 61.595,49.784 61.595,49.784 62.865,49.784 62.865,49.784 64.135,49.784 64.135,49.784 65.405,49.784 65.405,49.784 13.335,51.054 17.145,51.054 18.415,51.054 19.685,51.054 20.955,51.054 22.225,51.054 23.495,51.054 24.765,51.054 26.035,51.054 27.305,51.054 27.305,51.054 28.575,51.054 28.575,51.054 29.845,51.054 29.845,51.054 31.115,51.054 31.115,51.054 32.385,51.054 32.385,51.054 33.655,51.054 33.655,51.054 34.925,51.054 34.925,51.054 36.195,51.054 36.195,51.054 37.465,51.054 37.465,51.054 38.735,51.054 38.735,51.054 40.005,51.054 40.005,51.054 41.275,51.054 41.275,51.054 42.545,51.054 42.545,51.054 43.815,51.054 43.815,51.054 45.085,51.054 45.085,51.054 46.355,51.054 46.355,51.054 47.625,51.054 47.625,51.054 48.895,51.054 48.895,51.054 50.165,51.054 50.165,51.054 51.435,51.054 51.435,51.054 52.705,51.054 52.705,51.054 53.975,51.054 53.975,51.054 55.245,51.054 55.245,51.054 56.515,51.054 56.515,51.054 57.785,51.054 57.785,51.054 59.055,51.054 59.055,51.054 60.325,51.054 60.325,51.054 61.595,51.054 61.595,51.054 62.865,51.054 62.865,51.054 64.135,51.054 64.135,51.054 65.405,51.054 65.405,51.054 66.675,51.054 66.675,51.054 1.905,52.324 13.335,52.324 14.605,52.324 15.875,52.324 17.145,52.324 18.415,52.324 19.685,52.324 20.955,52.324 22.225,52.324 23.495,52.324 24.765,52.324 26.035,52.324 27.305,52.324 27.305,52.324 28.575,52.324 28.575,52.324 29.845,52.324 29.845,52.324 31.115,52.324 31.115,52.324 32.385,52.324 32.385,52.324 33.655,52.324 33.655,52.324 34.925,52.324 34.925,52.324 36.195,52.324 36.195,52.324 37.465,52.324 37.465,52.324 38.735,52.324 38.735,52.324 40.005,52.324 40.005,52.324 41.275,52.324 41.275,52.324 42.545,52.324 42.545,52.324 43.815,52.324 43.815,52.324 45.085,52.324 45.085,52.324 46.355,52.324 46.355,52.324 47.625,52.324 47.625,52.324 48.895,52.324 48.895,52.324 50.165,52.324 50.165,52.324 51.435,52.324 51.435,52.324 52.705,52.324 52.705,52.324 53.975,52.324 53.975,52.324 55.245,52.324 55.245,52.324 56.515,52.324 56.515,52.324 57.785,52.324 57.785,52.324 59.055,52.324 59.055,52.324 60.325,52.324 60.325,52.324 61.595,52.324 61.595,52.324 62.865,52.324 62.865,52.324 64.135,52.324 64.135,52.324 65.405,52.324 65.405,52.324 66.675,52.324 66.675,52.324 1.905,53.594 3.175,53.594 10.795,53.594 12.065,53.594 13.335,53.594 14.605,53.594 15.875,53.594 17.145,53.594 18.415,53.594 19.685,53.594 20.955,53.594 22.225,53.594 23.495,53.594 24.765,53.594 26.035,53.594 27.305,53.594 27.305,53.594 28.575,53.594 28.575,53.594 29.845,53.594 29.845,53.594 31.115,53.594 31.115,53.594 32.385,53.594 32.385,53.594 33.655,53.594 33.655,53.594 34.925,53.594 34.925,53.594 36.195,53.594 36.195,53.594 37.465,53.594 37.465,53.594 38.735,53.594 38.735,53.594 40.005,53.594 40.005,53.594 41.275,53.594 41.275,53.594 42.545,53.594 42.545,53.594 43.815,53.594 43.815,53.594 45.085,53.594 45.085,53.594 46.355,53.594 46.355,53.594 47.625,53.594 47.625,53.594 48.895,53.594 48.895,53.594 50.165,53.594 50.165,53.594 51.435,53.594 51.435,53.594 52.705,53.594 52.705,53.594 53.975,53.594 53.975,53.594 55.245,53.594 55.245,53.594 56.515,53.594 56.515,53.594 57.785,53.594 57.785,53.594 59.055,53.594 59.055,53.594 60.325,53.594 60.325,53.594 61.595,53.594 61.595,53.594 62.865,53.594 62.865,53.594 64.135,53.594 64.135,53.594 65.405,53.594 65.405,53.594 66.675,53.594 66.675,53.594
NetC21_1: C21.1 R6.1 U1.97 | length 7
  Top Layer w0.254: R6.1 C21.1 13.066,12.216 13.066,13.32 13.961,14.215 U1.97
NetC23_2: C23.2 U1.99 Y1.1 | length 8.9
  Top Layer w0.254: U1.99 14.414,13.215 14.266,13.066 14.266,7.797 14.758,7.304 C23.2
NetC24_2: C24.2 U1.98 Y1.3 | length 12.9
  Top Layer w0.254: C24.2 10.283,5.931 11.272,5.931 ; Y1.3 11.272,5.931 ; U1.98 14.266,13.715 13.589,13.038 13.589,9.398 12.954,8.763 11.78,8.763 11.272,8.255 11.272,5.931
NetLED1_2: LED1.2 R1.1 | length 2.1
  Top Layer w0.762: LED1.2 2.529,40.324 R1.1
NetLED2_2: LED2.2 R2.1 | length 2.1
  Top Layer w0.762: LED2.2 6.658,40.324 R2.1
NetLED3_2: LED3.2 R7.1 | length 2
  Top Layer w0.254: LED3.2 R7.1
NetLED4_2: LED4.2 R8.1 | length 2
  Top Layer w0.254: LED4.2 R8.1
NetR10_2: R10.2 SW1.2 | length 1.8
  Top Layer w0.254: SW1.2 7.606,50.196 R10.2
PA0: P1.1 U1.72 | length 52.3
  Top Layer w0.254: v1(17.634,31.836) 17.634,27.94 18.438,27.136 18.438,26.347 U1.72
  Bottom Layer w0.254: v1(17.634,31.836) 17.752,31.718 25.775,31.718 32.792,38.735 54.991,38.735 P1.1
PA1: P1.2 U1.70 | length 51.5
  Top Layer w0.254: v1(18.936,28.807) 19.448,28.296 19.448,26.338 U1.70
  Bottom Layer w0.254: v1(18.936,28.807) 19.094,28.964 23.596,28.964 32.935,38.303 55.134,38.303 58.614,41.783 60.579,41.783 P1.2
PA2: P1.3 U1.66 | length 46.1
  Top Layer w0.254: U1.66@21.448,26.338 U1.66 21.464,26.322 21.464,25.55 21.845,25.169 v1(21.845,25.114)
  Bottom Layer w0.254: v1(21.845,25.114) 21.845,26.638 33.103,37.897 55.302,37.897 57.918,40.513 P1.3
PA3: P1.4 U1.64 | length 47.9
  Top Layer w0.254: U1.64@22.454,26.338 U1.64 22.464,26.322 22.464,25.385 22.632,25.217 v1(22.632,25.114)
  Bottom Layer w0.254: v1(22.632,25.114) 22.632,26.851 33.271,37.49 55.471,37.49 57.35,39.37 60.706,39.37 P1.4
PA4: P1.5 U1.55 | length 39.7
  Top Layer w0.254: U1.55 26.951,30.095 v1(27.082,30.226)
  Bottom Layer w0.254: v1(27.082,30.226) 27.082,30.726 33.44,37.084 58.294,37.084 59.183,37.973 P1.5
PA5: P1.6 U1.52 | length 41.1
  Top Layer w0.254: U1.52 28.461,26.345 28.461,27.232 29.045,27.815 v1(29.045,31.845)
  Bottom Layer w0.254: v1(29.045,31.845) 29.045,31.851 31.359,34.166 33.871,36.678 60.554,36.678 P1.6
PA7: P1.7 U1.24 | length 46.3
  Top Layer w0.254: U1.24 28.451,9.977 28.799,9.629 37.644,9.629 54.229,26.214 54.229,32.156 57.506,35.433 P1.7
PA8: P1.8 U1.25 | length 48.7
  Top Layer w0.254: U1.25 28.951,10.498 29.413,10.036 37.476,10.036 53.823,26.382 53.823,32.325 58.201,36.703 60.579,36.703 P1.8
PA9: P1.9 U1.54 | length 39.2
  Top Layer w0.254: U1.54 27.451,28.27 27.704,28.524 v1(27.704,29.679)
  Bottom Layer w0.254: v1(27.704,29.679) 27.723,29.679 29.641,31.597 34.315,36.271 53.518,36.271 56.896,32.893 P1.9
PA10: P1.10 U1.46 | length 39.9
  Top Layer w0.254: U1.46 31.567,22.715 42.672,33.82 42.672,35.491 v1(42.703,35.522)
  Bottom Layer w0.254: v1(42.703,35.522) 42.734,35.522 43.077,35.865 53.349,35.865 57.464,31.75 60.706,31.75 P1.10
PA11: P1.11 U1.44 | length 37.3
  Top Layer w0.254: U1.44 31.716,21.715 43.897,33.896 v1(43.897,35.268)
  Bottom Layer w0.254: v1(43.897,35.268) 43.973,35.343 53.296,35.343 58.178,30.462 59.2,30.462 P1.11
PA12: P1.12 U1.48 | length 40.6
  Top Layer w0.254: U1.48 30.584,23.727 31.43,23.727 31.993,24.291 41.275,33.572 41.275,35.53 v1(41.305,35.56)
  Bottom Layer w0.254: v1(41.305,35.56) 42.194,34.671 44.144,34.671 44.398,34.925 53.086,34.925 58.687,29.324 60.82,29.324 P1.12
PA13: P1.13 U1.27 | length 34.8
  Top Layer w0.254: U1.27 38.392,13.215 v1(51.181,26.004)
  Bottom Layer w0.254: v1(51.181,26.004) 57.5,26.004 P1.13
PA14: P1.14 U1.34 | length 42.4
  Top Layer w0.254: U1.34 32.428,16.715 43.561,27.847 43.561,30.057 47.67,34.166 v1(48.316,34.166)
  Bottom Layer w0.254: v1(48.316,34.166) 53.099,34.166 58.436,28.829 59.143,28.829 cw(c59.309,27.813) 59.475,28.829 60.833,28.829 P1.14
PA15: P1.15 U1.33 | length 35.4
  Top Layer w0.254: U1.33 32.503,16.215 45.117,28.829 v1(45.222,28.829)
  Bottom Layer w0.254: v1(45.222,28.829) 48.778,25.273 P1.15
PA16: P1.16 U1.30 | length 37.5
  Top Layer w0.254: U1.30 32.727,14.715 44.325,26.313 46.609,26.313 v1(46.638,26.342)
  Bottom Layer w0.254: v1(46.638,26.342) 46.638,26.284 48.745,24.177 60.753,24.177 P1.16
PA17: P1.17 U1.16 | length 73
  Top Layer w0.254: U1.16 24.451,9.634 24.315,9.498 24.315,4.759 24.528,4.547 31.123,4.547 31.849,5.273 v1(31.849,6.159)
  Bottom Layer w0.254: v1(31.849,6.159) 31.849,4.68 33.5,3.029 56.756,3.029 58.655,4.928 62.713,4.928 64.262,6.477 64.262,22.225 62.725,23.762 60.338,23.762 P1.17
PA18: P1.18 U1.15 | length 66.8
  Top Layer w0.254: U1.15 23.951,9.708 23.825,9.583 23.825,4.675 24.36,4.14 31.291,4.14 v1@32.539,5.388
  Bottom Layer w0.254: v1(32.57,5.419) 32.57,4.534 33.668,3.436 56.588,3.436 58.486,5.334 62.544,5.334 63.856,6.645 63.856,20.726 P1.18
PA19: P1.19 U1.14 | length 63.8
  Top Layer w0.254: U1.14 23.451,9.783 23.419,9.751 23.419,4.442 24.127,3.734 32.309,3.734 33.253,4.678 v1(33.29,4.678)
  Bottom Layer w0.254: v1(33.29,4.678) 56.515,4.678 58.113,6.276 62.336,6.276 63.043,6.982 63.043,18.424 62.671,18.796 60.706,18.796 P1.19
PA20: P1.20 U1.13 | length 63.2
  Top Layer w0.254: U1.13 22.951,9.779 23.012,9.718 23.012,4.274 23.959,3.327 33.41,3.327 34.011,3.928 v1(34.011,4.033)
  Bottom Layer w0.254: v1(34.011,4.033) 56.61,4.033 58.447,5.869 62.505,5.869 63.449,6.814 63.449,18.593 P1.20
PA21: P1.21 U1.21 | length 37.6
  Top Layer w0.254: U1.21 26.951,9.372 27.1,9.223 37.925,9.223 46.355,17.653 P1.21
PA22: P1.22 U1.26 | length 38.2
  Top Layer w0.254: U1.26 38.736,12.715 v1(49.501,23.479)
  Bottom Layer w0.254: v1(49.501,23.479) 54.151,18.829 59.924,18.829 60.929,17.824 61.678,17.824 P1.22
PA23: P1.23 U1.31 | length 38.6
  Top Layer w0.254: U1.31 32.653,15.215 44.369,26.932 v1(45.455,26.932)
  Bottom Layer w0.254: v1(45.455,26.932) 45.528,26.859 45.528,26.608 57.023,15.113 P1.23
PA24: P1.24 U1.38 | length 43.4
  Top Layer w0.254: U1.38 32.129,18.715 41.745,28.33 v1(41.745,29.502)
  Bottom Layer w0.254: v1(41.745,29.502) 41.938,29.502 57.597,13.843 60.579,13.843 P1.24
PA25: P1.25 U1.40 | length 39.6
  Top Layer w0.254: U1.40 32.555,19.715 41.05,28.21 41.05,28.756 v1(41.123,28.829)
  Bottom Layer w0.254: v1(41.123,28.829) 42.036,28.829 58.171,12.694 59.188,12.694 P1.25
PA26: P1.26 U1.42 | length 42
  Top Layer w0.254: U1.42 32.137,20.715 v1(39.676,28.255) v1(39.676,28.255)
  Bottom Layer w0.254: v1(39.676,28.255) 39.738,28.194 42.097,28.194 58.002,12.288 58.01,12.288 58.995,11.303 60.579,11.303 P1.26
PA27: P1.27 U1.50 | length 37.9
  Top Layer w0.254: U1.50 30.843,24.715 33.41,27.281 v1(33.41,27.771)
  Bottom Layer w0.254: v1(33.41,27.771) 33.584,27.597 42.119,27.597 57.834,11.882 57.841,11.882 58.954,10.769 58.954,10.725 59.309,10.37 P1.27
PA28: P1.28 U1.79 | length 57.4
  Top Layer w0.254: U1.79 15.344,23.202 16.4,23.202 16.592,23.009 v1(16.592,22.812)
  Bottom Layer w0.254: v1(16.592,22.812) 16.638,22.766 22.169,22.766 26.577,27.174 41.907,27.174 57.963,11.118 57.963,9.785 58.744,9.004 60.82,9.004 P1.28
PA30: P1.29 U1.82 | length 54.6
  Top Layer w0.254: U1.82 15.344,21.702 16.524,21.702 v1(16.659,21.567)
  Bottom Layer w0.254: v1(16.659,21.567) 22.12,21.567 26.843,26.29 41.641,26.29 57.15,10.782 57.15,9.448 59.105,7.493 P1.29
PA31: P1.30 U1.83 | length 60.6
  Top Layer w0.254: v1(13.893,22.154) 13.966,22.082 13.966,21.808 14.547,21.227 15.318,21.227 U1.83
  Bottom Layer w0.254: v1(13.893,22.154) 13.903,22.164 22.142,22.164 26.675,26.697 41.809,26.697 57.556,10.95 57.556,9.616 58.576,8.597 60.17,8.597 61.036,7.731 61.611,7.731 P1.30
PB0: P3.1 U1.12 | length 22.8
  Top Layer w0.254: U1.12 22.451,9.705 22.606,9.55 22.606,4.106 23.791,2.921 33.838,2.921 34.633,3.715 34.633,6.515 P3.1
PB1: P3.2 U1.11 | length 25.1
  Top Layer w0.254: U1.11 21.951,9.63 22.2,9.381 22.2,3.937 23.622,2.515 34.153,2.515 37.084,5.446 P3.2
PB2: P3.3 U1.17 | length 23.4
  Top Layer w0.254: U1.17 24.951,9.559 24.722,9.33 24.722,5.102 24.87,4.953 30.954,4.953 31.252,5.251 31.252,6.407 32.642,7.797 38.431,7.797 P3.3
PB3: P3.4 U1.20 | length 18.6
  Top Layer w0.254: U1.20 26.451,9.297 26.931,8.817 39.951,8.817 P3.4
PB4: P3.5 U1.74 | length 65.5
  Top Layer w0.254: U1.74 17.464,26.322 17.464,25.55 18.648,24.366 26.779,24.366 v1(27.432,25.019)
  Bottom Layer w0.254: v1(27.432,25.019) 27.535,25.019 27.967,25.451 41.331,25.451 56.337,10.445 56.337,5.791 56.121,5.575 48.646,5.575 48.498,5.723 48.498,7.128 47.752,7.874 45.974,7.874 P3.5
PB12: LED3.1 P3.6 U1.61 | length 58.6
  Top Layer w0.254: U1.61 23.964,26.322 23.964,25.55 24.495,25.019 v1(26.416,25.019) ; P3.6 LED3.1@47.244,9.312
  Bottom Layer w0.254: v1(26.416,25.019) 27.254,25.857 41.5,25.857 56.744,10.613 56.744,7.214 56.744,5.623 56.289,5.168 54.698,5.168 48.478,5.168 47.244,6.402 P3.6
PB13: LED4.1 P3.7 U1.100 | length 48.4
  Top Layer w0.254: v1(15.331,4.268) 15.358,4.268 17.594,2.032 45.212,2.032 P3.7 49.784,9.172 LED4.1 ; v1(15.331,10.116) U1.100
  Bottom Layer w0.254: v1(15.331,4.268) v1(15.331,10.116)
PD0: P2.1 U1.1 | length 36.7
  Top Layer w0.254: v1(16.383,31.242) 16.383,25.594 17.662,24.315 17.662,20.413 16.951,19.701 U1.1 ; v1(16.402,38.227) 16.402,38.371 17.907,39.876 P2.1
  Bottom Layer w0.254: v1@16.194,38.227 v1(16.402,38.227) 16.383,38.208 v1(16.383,31.242)
PD1: P2.2 U1.92 | length 42.7
  Top Layer w0.254: U1.92 15.318,16.727 14.345,16.727 12.529,18.543 9.218,18.543 7.899,19.861 7.899,28.865 19.2,40.165 19.2,47.348 P2.2
PD2: P2.3 U1.91 | length 39.3
  Top Layer w0.254: U1.91 15.318,17.227 14.42,17.227 12.697,18.95 9.386,18.95 8.306,20.03 8.306,28.696 20.447,40.837 P2.3
PD3: P2.4 U1.89 | length 41.8
  Top Layer w0.254: U1.89 14.007,18.215 12.866,19.356 9.554,19.356 8.712,20.198 8.712,28.528 21.717,41.533 21.717,47.371 P2.4
PD4: P2.5 U1.88 | length 38.4
  Top Layer w0.254: U1.88 14.082,18.715 13.034,19.762 9.794,19.762 9.786,19.771 9.714,19.771 9.119,20.366 9.119,28.36 22.987,42.228 P2.5
PD5: P2.6 U1.87 | length 41.1
  Top Layer w0.254: U1.87 14.18,19.215 13.217,20.178 9.882,20.178 9.525,20.535 9.525,28.191 24.257,42.923 24.257,47.371 P2.6
PD6: P2.7 U1.85 | length 35.2
  Top Layer w0.254: U1.85 14.329,20.215 13.192,21.352 12.89,21.654 12.89,22.776 10.884,24.782 9.937,25.729 9.937,28.028 10.884,28.975 25.527,43.619 P2.7
PD7: P2.8 U1.84 | length 37.8
  Top Layer w0.254: U1.84 15.318,20.727 14.391,20.727 13.296,21.823 13.296,22.945 11.29,24.95 10.414,25.827 10.414,27.931 11.29,28.807 26.797,44.314 26.797,47.371 P2.8
PD8: P2.9 U1.80 | length 33.1
  Top Layer w0.254: U1.80 15.294,22.751 14.064,22.751 11.697,25.119 10.853,25.963 10.853,27.795 11.697,28.639 28.028,44.97 28.028,46.062 P2.9
PD9: P2.10 U1.78 | length 35.5
  Top Layer w0.254: U1.78 15.328,23.711 13.679,23.711 11.259,26.131 11.259,27.627 29.171,45.539 29.171,47.537 P2.10
PD10: P2.11 U1.71 | length 25.1
  Top Layer w0.254: U1.71 18.951,27.277 18.288,27.94 18.288,33.401 30.252,45.365 30.252,45.409 30.607,45.764 P2.11
PD11: P2.12 U1.69 | length 29.2
  Top Layer w0.254: U1.69 19.951,28.641 18.936,29.656 18.936,33.475 29.776,44.314 30.685,44.314 31.91,45.539 31.91,47.338 P2.12
PD12: P2.13 U1.65 | length 24.4
  Top Layer w0.254: U1.65 21.951,27.271 22.606,27.926 22.606,32.582 22.677,32.653 22.677,32.689 23.027,33.039 23.064,33.039 33.147,43.123 P2.13
PD13: P2.14 U1.62 | length 27.4
  Top Layer w0.254: U1.62 23.451,27.366 23.871,27.786 23.871,33.272 34.417,43.818 34.417,47.371 P2.14
PD14: P2.15 U1.59 | length 24.8
  Top Layer w0.254: U1.59 24.951,27.277 24.289,27.938 24.289,33.115 35.687,44.513 P2.15
PD15: P2.16 U1.75 | length 35.2
  Top Layer w0.254: U1.75 16.98,26.364 16.98,32.717 29.578,45.315 29.578,49.403 29.591,49.403 29.972,49.784 34.798,49.784 35.687,48.895 P2.16
PD16: P2.17 U1.56 | length 24.6
  Top Layer w0.254: U1.56 26.451,33.099 38.227,44.875 P2.17
PD17: P2.18 U1.53 | length 27.4
  Top Layer w0.254: U1.53 27.951,27.754 28.321,28.124 28.321,34.33 39.256,45.266 39.256,47.612 P2.18
PD18: P2.19 U1.49 | length 26.6
  Top Layer w0.254: U1.49 30.584,24.227 31.355,24.227 31.587,24.459 40.708,33.58 40.708,46.042 P2.19
PD19: P2.20 U1.47 | length 31.3
  Top Layer w0.254: U1.47 31.492,23.215 32.4,24.122 42.106,33.829 42.106,47.302 P2.20
PD20: P2.21 U1.45 | length 29.8
  Top Layer w0.254: U1.45 31.641,22.215 43.3,33.873 43.3,46.094 P2.21
PD21: P2.22 U1.43 | length 34.5
  Top Layer w0.254: U1.43 31.792,21.215 44.567,33.99 44.567,47.381 P2.22
PD22: P2.23 U1.41 | length 33.4
  Top Layer w0.254: U1.41 30.584,20.227 32.493,20.227 40.386,28.121 40.386,29.21 45.936,34.76 45.936,46.012 P2.23
PD24: P2.24 U1.37 | length 38.6
  Top Layer w0.254: U1.37 30.584,18.227 32.217,18.227 42.342,28.352 42.342,30.591 46.936,35.185 46.936,47.552 P2.24
PD25: P2.25 U1.35 | length 37.3
  Top Layer w0.254: U1.35 32.354,17.215 43.155,28.016 43.155,30.226 48.387,35.458 P2.25
PD26: P2.26 U1.36 | length 39.3
  Top Layer w0.254: U1.36 32.279,17.715 42.748,28.184 42.748,30.423 47.371,35.046 47.371,45.935 cw(c48.387,46.101) 47.371,46.267 47.371,47.625 P2.26
PD27: P2.27 U1.32 | length 40.2
  Top Layer w0.254: U1.32 32.578,15.715 44.201,27.338 44.575,27.338 50.927,33.69 P2.27
PD28: P2.28 U1.51 | length 39.4
  Top Layer w0.254: U1.51 28.951,26.932 29.641,27.622 29.641,35.076 39.738,45.172 39.738,49.067 40.708,50.038 49.53,50.038 P2.28
PD30: P2.29 U1.23 | length 53.3
  Top Layer w0.254: U1.23 27.964,11.107 27.964,11.958 28.116,12.111 29.206,12.111 30.875,10.442 37.307,10.442 53.416,26.551 53.416,46.05 P2.29
PD31: P2.30 U1.2 | length 67.3
  Top Layer w0.254: U1.2 17.448,11.098 17.448,19.623 18.069,20.244 18.069,23.344 18.684,23.959 27.847,23.959 30.201,26.313 30.201,34.777 v1(39.738,44.314)
  Bottom Layer w0.254: v1(39.738,44.314) 39.738,49.067 40.708,50.038 52.07,50.038 P2.30
RESET: C25.1 P5.10 R9.2 R10.1 U1.58 | length 45.6
  Top Layer w0.254: P5.10 3.048,50.902 3.332,51.186 3.332,51.198 5.125,52.992 8.964,52.992 9.006,53.033 ; R9.2 9.006,53.033 ; C25.1 R10.1 ; v1(16.383,42.787) 13.577,45.593 9.119,45.593 9.119,51.83 R10.1 ; v1(24.892,32.315) 24.892,27.983 25.451,27.424 U1.58 ; R10.1 9.006,53.033
  Bottom Layer w0.254: v1(16.383,42.787) 24.892,34.278 v1(24.892,32.315)
SWCLK: P5.4 R5.2 U1.63 | length 40.6
  Top Layer w0.254: R5.2 10.328,40.365 10.328,43.393 v1@10.287,43.434 ; v1(10.331,43.472) 10.293,43.434 v1@10.287,43.434 ; U1.63 22.951,27.441 23.241,27.731 23.241,32.409 v1(23.274,32.442) ; P5.4@2.698,46.716 2.386,46.404 2.083,46.101 2.083,43.987 2.636,43.434 v1@10.287,43.434 ; P5.4@2.698,46.716 2.901,46.716 P5.4 2.845,46.863 P5.4@2.698,46.716
  Bottom Layer w0.254: v1(10.331,43.472) 10.369,43.434 14.595,43.434 23.241,34.788 23.241,32.475 v1(23.274,32.442)
SWDIO: P5.2 R4.2 U1.57 | length 39.7
  Top Layer w0.254: R4.2@13.893,40.324 R4.2 14.082,40.563 v1(14.082,44.069) ; v1(25.654,32.766) 25.654,27.924 25.951,27.627 U1.57
  Bottom Layer w0.254: P5.2 3.11,45.531 3.11,44.847 3.888,44.069 v1(14.082,44.069) 16.02,44.069 25.654,34.435 v1(25.654,32.766)
SWO: P5.6 R3.2 U1.77 | length 34.3
  Top Layer w0.254: v1(12.7,25.963) 12.7,25.35 13.83,24.22 15.326,24.22 U1.77
  Bottom Layer w0.254: P5.6 2.819,48.133 2.57,47.884 2.488,47.884 2.08,47.476 2.08,45.01 3.529,43.561 9.324,43.561 11.991,40.894 v1(12.065,40.894) 12.7,40.259 v1(12.7,25.963)
USB_D_N: J1.2 U1.94 U2.3 | length 11
  Top Layer w0.254: J1.2 4.955,15.733 8.739,15.733 ; U2.3 8.739,15.733 ; U1.94@14.888,15.733 8.739,15.733
USB_D_P: J1.3 U1.95 U2.2 | length 11.5
  Top Layer w0.254: J1.3 4.955,15.225 8.739,15.225 ; U2.2 8.739,15.225 ; U1.95 15.32,15.225 8.739,15.225
VBUS: C1.1 C2.1 C3.1 C4.1 J1.1 LED1.1 P4.1 P4.2 U2.4 U3.1 | length 41.6
  Top Layer w0.254: J1.1@4.318,16.51 4.374,16.454 J1.1
  Top Layer w0.381: J1.1 U2.4@6.858,16.454
  Top Layer w0.508: P4.1 P4.2
  Top Layer w0.512: U3.1@2.348,29.577 U3.1 ; 3.999,16.829 J1.1@4.318,16.51
  Top Layer w0.762: U3.1@2.348,29.577 C4.1 C1.1 C2.1 C3.1 2.348,20.512 2.462,20.398 2.462,20.114 3.621,18.954 3.621,17.207 3.999,16.829 ; LED1.1 2.248,38.343 2.029,38.124 2.029,37.889 1.817,37.678 1.817,30.695 2.388,30.124 U3.1
  Bottom Layer w0.508: v2@2.413,20.38 v2(2.413,20.447) 0.889,18.923 0.889,10.016 P4.1
VDDMIC: C26.2 FB1.1 U1.96 | length 5.3
  Top Layer w0.254: C26.2 FB1.1 12.516,14.715 U1.96
VDDOUT: C15.1 C16.1 C17.1 C18.1 C19.1 C20.1 FB1.2 FB2.2 U1.4 U1.18 U1.22 U1.39 U1.76 | length 72.9
  Top Layer w0.254: C17.1 14.113,26.993 v1@14.113,24.807 ; v1@14.193,24.727 15.318,24.727 U1.76 ; C19.1 18.451,7.467 U1.4 18.464,11.107 18.464,13.012 v1(18.936,13.485) 19.772,14.32 27.451,14.32 ; v1(19.12,23.362) 19.13,23.373 28.717,23.373 29.555,22.535 29.555,19.247 29.588,19.215 ; v1(25.451,7.874) U1.18 ; v1(27.548,9.878) 27.548,10.032 27.464,10.116 27.464,11.082 U1.22 27.451,14.32 ; v1(28.753,7.874) C20.1 C15.1 ; U1.39 29.588,19.215 ; 27.451,14.32 27.451,17.209 29.457,19.215 29.588,19.215
  Bottom Layer w0.254: v1(10.414,22.86) 10.463,22.909 10.844,22.909 12.752,24.817 v1(14.18,24.817) ; v1(11.976,12.2) 17.652,12.2 v1(18.936,13.485) ; v1@14.18,24.715 17.59,24.715 18.932,23.373 19.109,23.373 v1(19.12,23.362) ; v1(25.451,7.874) 27.548,7.874 ; v1(27.548,9.878) 27.548,7.874 ; v1(28.753,7.874) 27.548,7.874
VDDPLL: C27.2 FB2.1 U1.86 | length 5.5
  Top Layer w0.254: FB2.1 10.477,20.828 C27.2@12.128,20.828 ; C27.2 C27.2@12.128,20.828 ; U1.86 14.255,19.715 13.141,20.828 C27.2@12.128,20.828
pads on no net: J1.4 P5.7 P5.8 P5.9 SW1.3 SW1.4 U1.60 U1.73 Y1.2 Y1.4

## Polygon pours and split planes (outlines as drawn)
GND on Bottom Layer "Bottom Layer-GND" (solid, remove dead copper, pour order 0): 0.127,0 68.199,0 68.199,55.372 0.127,55.372
GND on Top Layer "Top Layer-GND" (solid, remove dead copper, pour order 2): 0.127,0 68.199,0 68.199,55.372 0.127,55.372

## Silkscreen, mask and mechanical layers (free items; w line width, h text height)
Top Overlay:
  text "4" at 0.454,26.222 h1.2
  text "6" at 8.174,26.222 h1.2
  text "1" at 0.654,24.368 h1.2
  text "5" at 8.174,24.368 h1.2
  text "2" at 0.454,22.646 h1.2
  text "7" at 8.174,22.646 h1.2
  text "3" at 0.454,20.856 h1.2
  text "5V" at 6.804,8.817 h1.2 r270
  text "GND" at 2.105,0.454 h1.2
Outline:
  the board outline again, w0.127